# Altium PCB CAS_SMPS_PCB.PcbDoc
Units mm, origin at the board's own origin, x right, y up, seen from the top; angles counter-clockwise.
Board outline 61.38 x 46.04 mm, 2 copper layers (Top Layer, Bottom Layer); 23 components, 9 nets, 64 pads, 169 vias.
Unrouted connection lines stored in the file: 21.
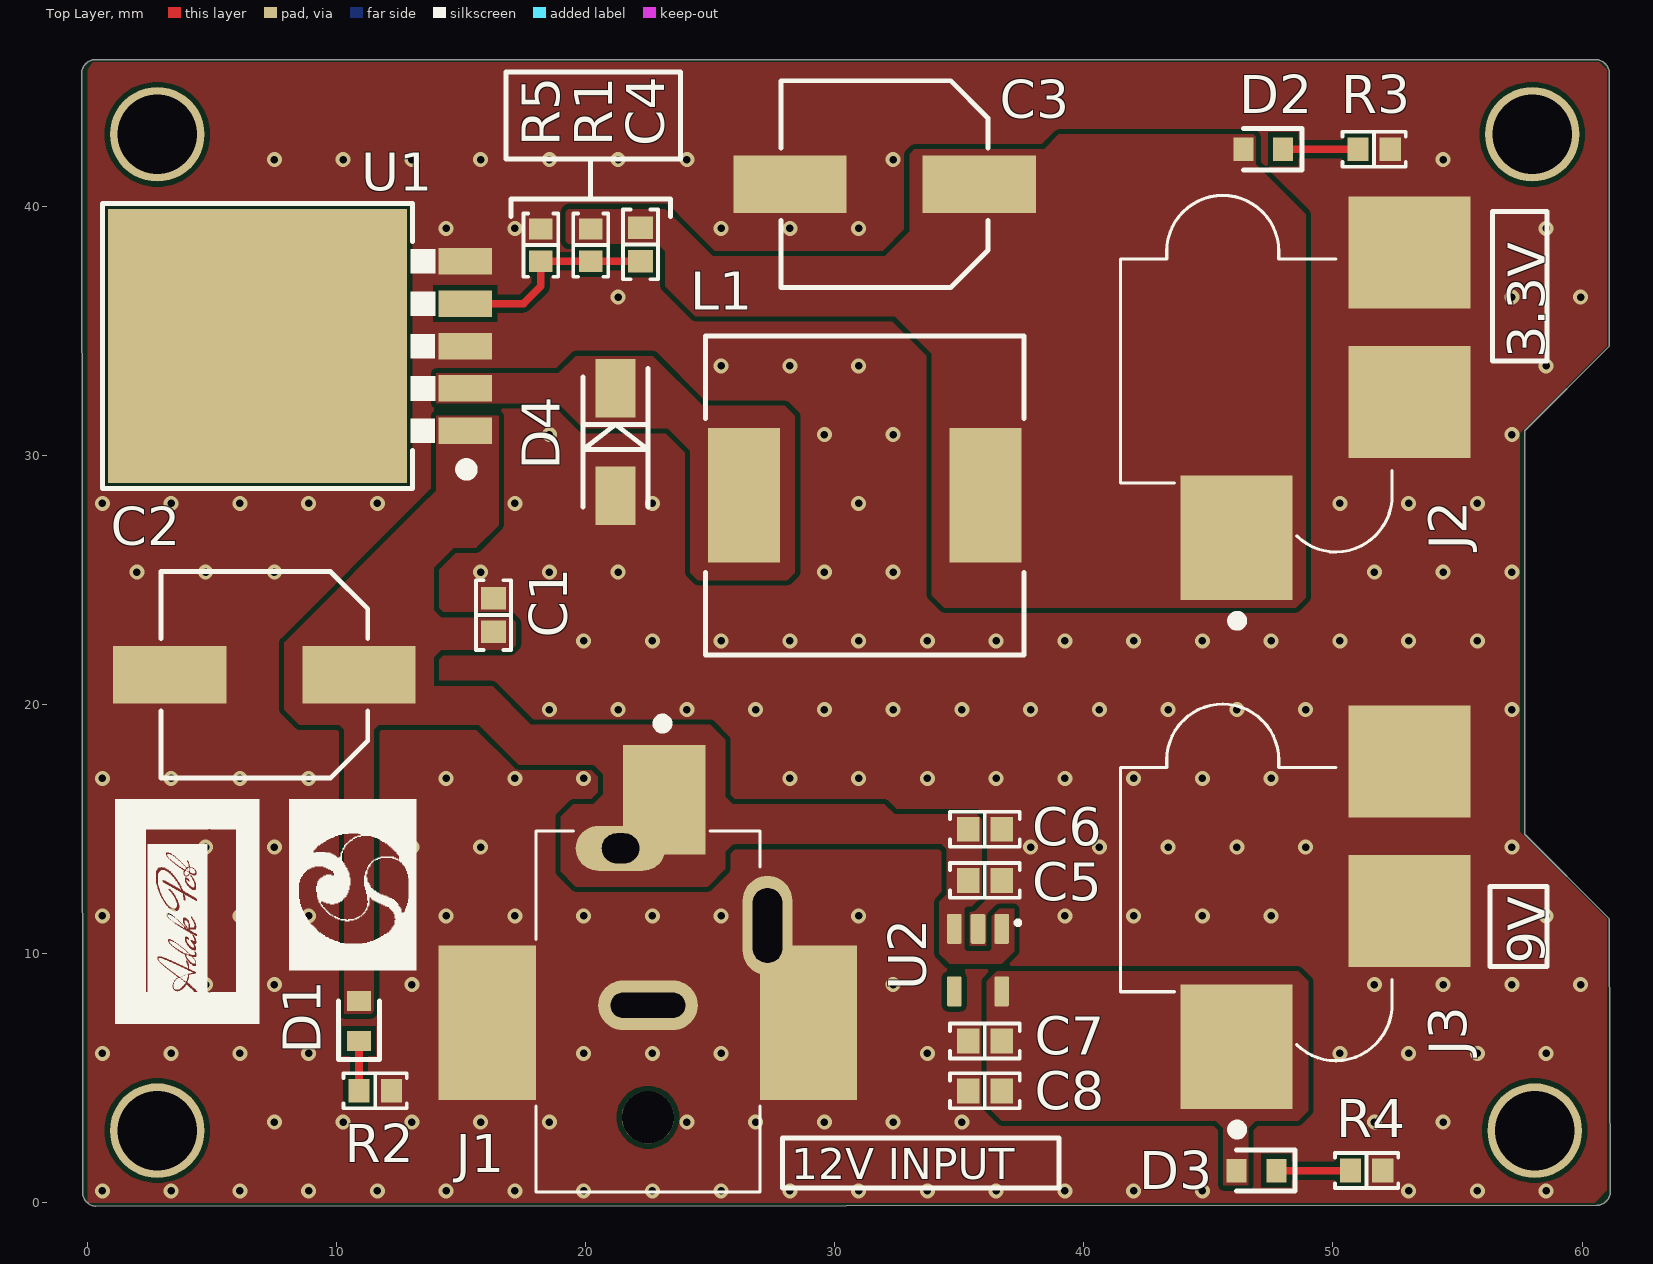
[diagram p0: Top Layer view]
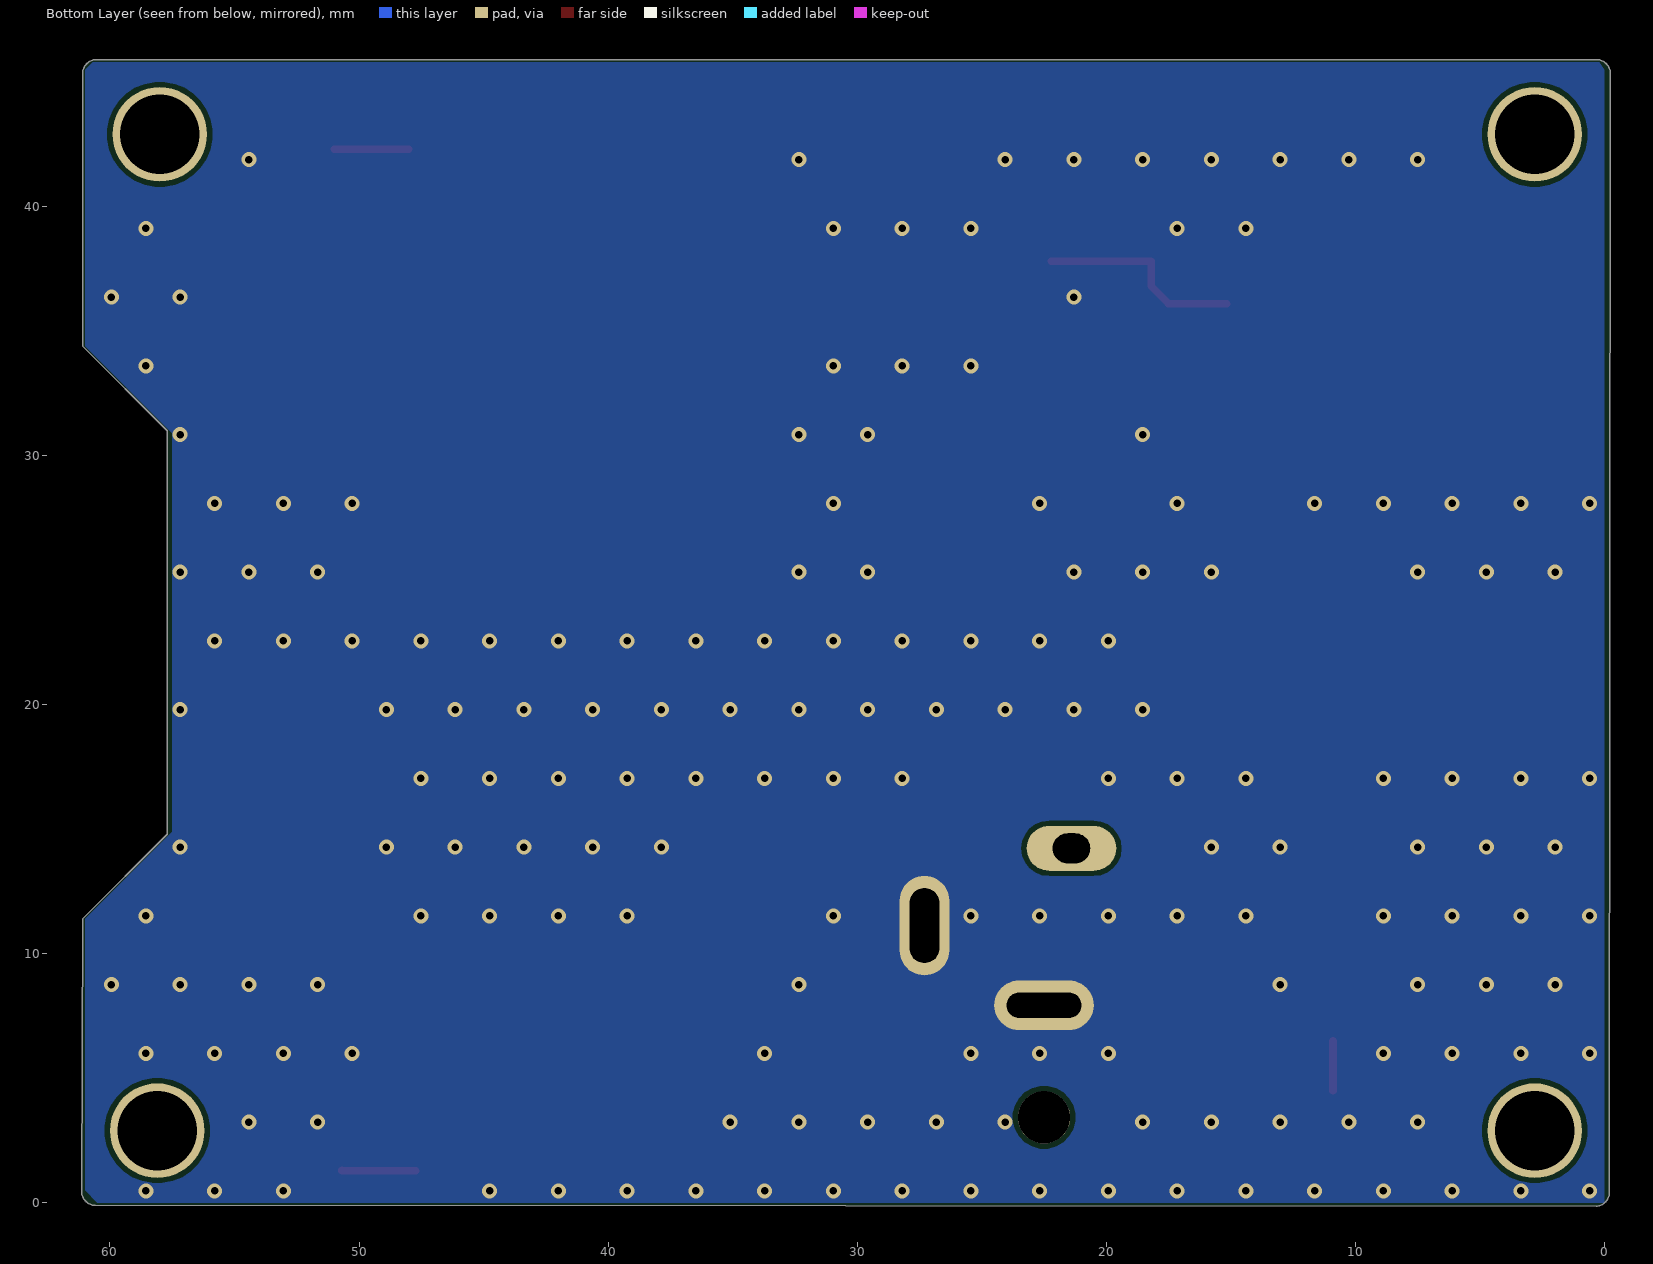
[diagram p1: Bottom Layer view, seen from below]
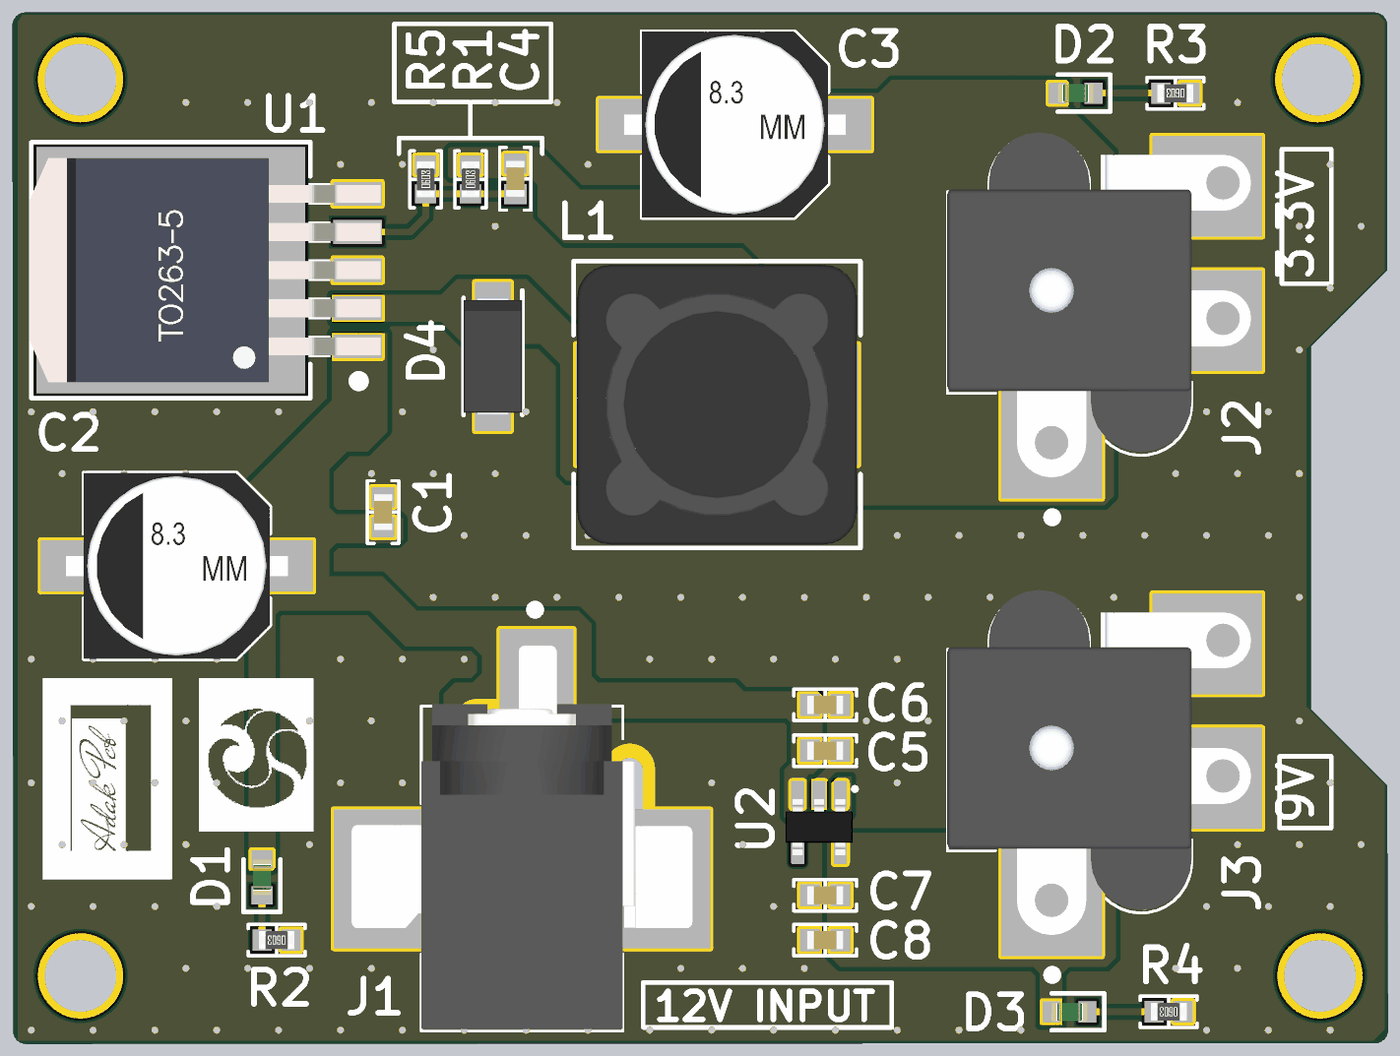
[diagram p2: 3D render of the assembled board from above, using the file's embedded part models]

## Layer stack, top to bottom
Top Solder: solder mask 0.0102, Solder Resist, Dk 3.5
Top Layer: signal copper 0.0356
Dielectric 1: dielectric 0.32, FR-4, Dk 4.8
Bottom Layer: signal copper 0.0356
Bottom Solder: solder mask 0.0102, Solder Resist, Dk 3.5

## Board outline
-0.2,0.4 -0.239,45.361 cw(c0.339,45.323) 0.3,45.9 60.562,45.9 cw(c60.523,45.323) 61.1,45.361 61.1,34.4 57.7,31 57.7,14.8 61.1,11.4 61.139,0.439 cw(c60.561,0.477) 60.6,-0.1 0.339,-0.139 cw(c0.377,0.439)

## Design rules (kind name [scope] priority, off if disabled: settings)
Clearance [All] p1: gap=0.2 ignorepadtopadclearanceinfootprint=FALSE except(0: Arc-Hole Track-Hole SMDPad-Hole THPad-Hole Via-Hole Fill-Hole Poly-Hole Region-Hole Text-Hole)
HoleSize [All] p1: absolutevalues=TRUE maxlimit=3 minlimit=0.05 maxpercent=80.000 minpercent=20.000
PolygonConnect [All] p1: connectstyle=Relief reliefconductorwidth=0.254 reliefentries=4 polygonreliefangle="90 Angle" airgapwidth=0.254
RoutingVias [All] p1: holewidth=0.711 width=1.27 viastyle="Through Hole" minholewidth=0.711 minwidth=1.27 maxholewidth=0.711 maxwidth=1.27
SilkToSilkClearance [All] p1: silktosilkclearance=0.1
SilkToSolderMaskClearance [IsPad] p1: minsilkscreentomaskgap=0.1 clearancetoexposedcopper=TRUE
SolderMaskExpansion [All] p1: expansion=0.132 istentingtop=FALSE
Width [All] p1: maxlimit=0.4 minlimit=0.2 preferedwidth=0.3
27 further rules are at their usual default settings.

## Components (designator, comment, footprint, x,y, rotation, side; value= is the part's Value field where it differs from the comment)
C1 "1µF" "CAP 0603_1608" 16.3,23.6 r270 top
C2 "470μF" "CAP ALSMD 8.3MM H10.5MM" 7.1,21.2 r180 top
C3 "220 µF" "CAP ALSMD 8.3MM H10.5MM" 32,40.9 r180 top
C4 "0.033 µF" "CAP 0603_1608" 22.2,38.479 r270 top
C5 "1µF" "CAP 0603_1608" 36.025,12.95 r180 top
C6 "0.47 µF" "CAP 0603_1608" 36.025,15 r180 top
C7 "0.47 µF" "CAP 0603_1608" 36.025,6.5 r0 top
C8 "1 µF" "CAP 0603_1608" 36.025,4.5 r0 top
D1 "APT1608SGC" LED 10.9,7.3 r90 top
D2 "APT1608SGC" LED 47.2,42.3 r180 top
D3 "APT1608SGC" LED 46.925,1.295 r180 top
D4 "DIODE" DIODE2 21.2,30.548 r270 top
J1 "PJ-037AH-SMT-TR" JACK1 22.5,7.933 r90 top
J2 "CONN PWR JACK" JACK2 49.6,32.425 r90 top
J3 "CONN PWR JACK" JACK2 49.6,12 r90 top
L1 "22 µH" "BOURNS SRR1280" 31.2,28.4 r0 top
R1 "8.2 kOhms" "RES 0603_1608" 20.2,38.454 r90 top
R2 "620 Ohms" "RES 0603_1608" 11.55,4.5 r180 top
R3 "340 Ohms" "RES 0603_1608" 51.65,42.3 r180 top
R4 "56 Ohms" "RES 0603_1608" 51.35,1.3 r180 top
R5 "1.3 kOhms" "RES 0603_1608" 18.2,38.454 r90 top
U1 "AP3003" TO-263-5 8.1,34.4 r90 top
U2 "IC REG LINEAR" SOT-23-5 35.75,9.745 r270 top

## Footprints (in the part's own frame and the unit in brackets; to place one, negate y for a bottom-side part, rotate by r counter-clockwise, add the part's x,y. Pads: shape width x height; smd on the part's side, far side on the other; paste and mask are expansions set on the pad)
"BOURNS SRR1280" [mm] "Precision Wire Wound Inductor, 2-Leads, Body 12.50x12.50mm, IPC Medium Density"
  rect 2.9x5.4 smd: 1(-4.85,0) 2(4.85,0)
  silkscreen extent -6.4,-6.4 6.4,6.4, body extent -6.25,-6.25 6.25,6.25, height 7.9
"CAP 0603_1608" [mm] "Chip Capacitor, 2-Leads, Body 1.60x0.80mm, IPC Medium Density"
  rect 0.9x1 smd: 1(-0.675,0) 2(0.675,0)
  silkscreen extent -1.4,-0.7 1.4,0.7, body extent -0.8,-0.41 0.8,0.41, height 0.82
"CAP ALSMD 8.3MM H10.5MM" [mm] "Aluminum Electrolytic Capacitor, Body 8.30x8.30x10.50mm, IPC Low Density"
  rect 4.55x2.3 smd: 1(-3.8,0) 2(3.8,0)
  silkscreen extent -4.15,-4.15 4.15,4.15, body extent -4.95,-4.15 4.95,4.15, height 10.5
DIODE2 [mm]
  rect 2.35x1.6 smd: 1(-2.15,0) 2(2.15,0)
  silkscreen extent -2.95,-1.31 2.62,1.31, body extent -2.62,-1.31 2.62,1.31, height 2.95
JACK1 [mm]
  rect 4.4x3.3 smd: 1A(8.25,-0.65)
  oval 1.8x3.6 hole 1.2 slot 1.5 at 90 deg: 1B(6.3,1.1)
  rect 6.2x3.9 smd: 2A(-0.7,6.45) 3A(-0.7,-6.45)
  oval 2x4 hole 1 slot 3 at 90 deg: 2B(0,0)
  oval 4x2 hole 1.2 slot 3 at 0 deg: 3B(3.2,-4.8)
  round 2.1 hole 2.1 unplated: ""(-4.5,0)
  silkscreen extent -7.5,-4.5 11.51,4.5, body extent -7.4,-7.6 9.7,7.6, height 11
JACK2 [mm]
  rect 5x4.5 smd: 1(-5.725,3.475)
  rect 4.5x4.9 smd: 2(-0.275,-3.475) 3(5.725,-3.475)
  silkscreen extent -9.25,-2.78 8.03,8.13, body extent -7.27,-5.43 8.13,8.13, height 14.1
LED [mm]
  rect 0.8x0.95 smd: 1(-0.8,0) 2(0.8,0)
  silkscreen extent -1.55,-0.82 0.8,0.82, body extent -0.8,-0.4 0.8,0.4, height 0.76
"RES 0603_1608" [mm] "Chip Resistor, 2-Leads, Body 1.60x0.80mm, IPC Medium Density"
  rect 0.85x0.95 smd: 1(-0.65,0) 2(0.65,0)
  silkscreen extent -1.27,-0.7 1.27,0.7, body extent -0.8,-0.4 0.8,0.4, height 0.45
SOT-23-5 [mm]
  rrect25% 1.21x0.59 smd: 1(-1.255,0.95) 2(-1.255,0) 3(-1.255,-0.95) 4(1.255,-0.95) 5(1.255,0.95)
  silkscreen extent -1.57,1.53 -1.43,1.68, body extent -1.05,-1.5 1.45,1.5, height 1.07
TO-263-5 [mil]
  rect 42x85 smd: 1(-134,-278) 2(-67,-278) 3(0,-278) 4(67,-278) 5(134,-278)
  rect 433.07x472.44 smd: 6(0,50)
  silkscreen extent -225,-288 225,295, body extent -197,-319 197,298, height 188

## Part data
C1 C5: library part 06033D105MAT2A, "CAP CER 1UF 25V X5R 0603", Part Number=06033D105MAT2A
C2: library part 25TPV470M8X10.5, "CAP ALUM 470UF 20% 25V SMD", Part Number=25TPV470M8X10.5
C3: library part 25TXV220M8X10.5, "CAP ALUM 220UF 20% 25V SMD", Device Package="Radial, Can - SMD", ESR (Equivalent Series Resistance)=300mOhm, Lifetime @ Temp.="2000 Hrs @ 125°C", manufacturer=Rubycon, Operating Temperature="-40°C ~ 125°C", Ratings=AEC-Q200, Ripple Current @ High Frequency="220 mA @ 100 kHz", Ripple Current @ Low Frequency="132 mA @ 120 Hz", Supplier Part Number 1=1189-2122-1-ND, Tolerance=±20%, Voltage - Rated="25 V", Applications=Automotive, Capacitance="220 µF", componentlink1description=Datasheet, componentlink1url=http://www.rubycon.co.jp/en/catalog/e_pdfs/aluminum/e_txv.pdf, componentlink2description="DigiKey Link", componentlink2url=https://www.digikey.com/en/products/detail/rubycon/25TXV220M8X10-5/3568741, Height - Seated (Max)="0.413\" (10.50mm)", lastupdated="17.05.2023 20:53:00", Lifecycle Status=Active, Minimum Order=1, Mounting Type="Surface Mount", Package / Case="Radial, Can - SMD", packaging=TapeAndReel, Part Number=25TXV220M8X10.5, Part Status=Active, partid=7686, Polarization=Polar, price=0.20, series=TXV, Size / Dimension="0.315\" Dia (8.00mm)", Supplier 1=DigiKey, Surface Mount Land Size="0.327\" L x 0.327\" W (8.30mm x 8.30mm)"
C4: library part C0603C333J4REC7411, "CAP CER 0603 33NF 16V X7R 5%", Part Number=C0603C333J4REC7411
C6 C7: library part CC0603KRX5R8BB474, "CAP CER 0.47UF 25V X5R 0603", Part Number=CC0603KRX5R8BB474
C8: library part C0603C105K4RACAUTO, "CAP CER 1UF 16V X7R 0603", Part Number=C0603C105K4RACAUTO
D1 D2 D3: "LED GREEN CLEAR 0603 SMD", Case Code (Metric)=1608, Case Code (Imperial)=0603, Color=Green, Forward Current=20mA, Forward Voltage=2.2V, Lens Color=Clear, manufacturer=Kingbright, Max Operating Temperature=85°C, Min Operating Temperature=-40°C, Package Quantity=2000, Supplier Part Number 1=754-1121-1-ND, Case/Package=0603, Category=LEDs, componentlink1description=https://datasheet.ciiva.com/12400/apt1608sgc-32861-12400932.pdf?src-supplier=Mouser, componentlink1url=https://datasheet.ciiva.com/12400/apt1608sgc-32861-12400932.pdf?src-supplier=Mouser, componentlink2description=https://datasheet.ciiva.com/2113/apt1608sgc-2113808.pdf?src-supplier=Digi-Key, componentlink2url=https://datasheet.ciiva.com/2113/apt1608sgc-2113808.pdf?src-supplier=Digi-Key, ComponentLink3Description=https://datasheet.ciiva.com/14603/70062839-14603927.pdf?src-supplier=Allied+Electronics, ComponentLink3URL=https://datasheet.ciiva.com/14603/70062839-14603927.pdf?src-supplier=Allied+Electronics, Dominant Wavelength=568nm, Height=0.75mm, Lead Free="Lead Free", Length=1.6mm, Lens Style=Clear,Flat, Luminous Intensity=15mcd, Manufacturer Part Number=APT1608SGC, Mount="Surface Mount", Number of LEDs=1, Number of Pins=2, packaging="Tape and Reel", Pricing 1="1=0,3, 10=0,235, 100=0,1054, 500=0,09518, 1000=0,07818 (USD)", RoHS=Yes, RoHS Compliant=Yes, series=APT, Stock 1=173873, Supplier 1=Digi-Key, Test Current=20mA, Viewing Angle=120°, Wavelength=568nm, Width=0.8mm, Illumination Color=Green
D4: manufacturer="Sangdest Microelectronics", Manufacturer Part Number=S1G, Supplier Part Number 1=1655-S1GCT-ND, Pricing 1="1=0,13, 10=0,12, 100=0,0655, 500=0,04034, 1000=0,0275, 2000=0,02338 (USD)", RoHS=No, Stock 1=552177, Supplier 1=Digi-Key
J1: "2.0 x 6.3 mm, 5.0 A, Horizontal, Surface Mount (SMT), Dc Power Jack Connector", Case/Package=SMD/SMT, Color=Black, Current Rating=5A, Flammability Rating="UL94 V-0", manufacturer=CUI, Max Operating Temperature=85°C, Min Operating Temperature=-25°C, Package Quantity=200, Supplier Part Number 1=CP-037AHPJCT-ND, Voltage Rating=24V, Insulation Resistance=100MR, Category=Uncategorized, componentlink1description=http://www.mouser.com/ds/2/670/pj-037ah-smt-516065.pdf?src-supplier=Mouser, componentlink1url=http://www.mouser.com/ds/2/670/pj-037ah-smt-516065.pdf?src-supplier=Mouser, componentlink2description=https://www.cui.com/product/resource/digikeypdf/pj-037ah-smt-tr.pdf?src-supplier=Digi-Key, componentlink2url=https://www.cui.com/product/resource/digikeypdf/pj-037ah-smt-tr.pdf?src-supplier=Digi-Key, ComponentLink3Description=http://www.cui.com/product/resource/digikeypdf/pj-037ah-smt.pdf?src-supplier=Digi-Key, ComponentLink3URL=http://www.cui.com/product/resource/digikeypdf/pj-037ah-smt.pdf?src-supplier=Digi-Key, Connector Type=Jack, Contact Gender=Male, Contact Material=Copper, Contact Plating=Nickel, Gender=Male, Housing Color=Black, Housing Material=Thermoplastic, Manufacturer Part Number=PJ-037AH-SMT-TR, Mount="Surface Mount,Through Hole", Number of Conductors=2, Orientation=Horizontal, packaging="Tape and Reel", Pricing 1="1=1,500000, 10=1,304000, 25=1,248800, 50=1,221000 (USD)", RoHS=Yes, Shielding=Unshielded, Stock 1=44, Supplier 1=Digi-Key, Termination=Solder
J2 J3: library part PJ-006A-SMT-TR, "Power Barrel Connector Jack 2.00mm ID (0.079", Case/Package=SMD/SMT, Color=Black, Current Rating=4A, Flammability Rating="UL94 V-0", manufacturer=CUI, Max Operating Temperature=85°C, Min Operating Temperature=-20°C, Package Quantity=250, Voltage Rating=18V, Insulation Resistance=100MR, Category=Uncategorized, componentlink1description=https://datasheet.ciiva.com/16478/pj-006a-smt-16478075.pdf?src-supplier=Future+Electronics, componentlink1url=https://datasheet.ciiva.com/16478/pj-006a-smt-16478075.pdf?src-supplier=Future+Electronics, Connector Type=Jack,Power, Contact Gender=Male, Contact Material=Copper, Contact Plating=Nickel, Gender=Male, Housing Color=Black, Housing Material=Thermoplastic, Lead Free="Lead Free", Manufacturer Part Number=PJ-006A-SMT-TR, Mount="Surface Mount", RoHS=Yes, RoHS Compliant=Yes, series=-, Shielding=Unshielded, Supplier 1="Arrow Electronics", Supplier Part Number 1=PJ-006A-SMT-TR, Termination=Solder
L1: library part SRR1280-220M, "FIXED IND 22UH 4.3A 38.6MOHM SMD", Current - Saturation=4.1A, Current Rating (Amps)="4.3 A", DC Resistance (DCR)="38.6mOhm Max", Device Package=Nonstandard, Frequency - Self Resonant=11MHz, manufacturer="Bourns Inc.", Operating Temperature="-40°C ~ 125°C", Q @ Freq="20 @ 2.52MHz", Supplier Part Number 1=SRR1280-220MCT-ND, Tolerance=±20%, Inductance Frequency - Test="100 kHz", componentlink1description=Datasheet, componentlink1url=https://www.bourns.com/docs/Product-Datasheets/SRR1280.pdf, componentlink2description="DigiKey Link", componentlink2url=https://www.digikey.com/en/products/detail/bourns-inc/SRR1280-220M/1969996, Height - Seated (Max)="0.315\" (8.00mm)", lastupdated="17.05.2023 20:36:29", Lifecycle Status=Active, Material - Core=Ferrite, Minimum Order=1, Mounting Type="Surface Mount", Package / Case=Nonstandard, packaging=TapeAndReel, Part Number=SRR1280-220M, Part Status=Active, partid=18, price=0.53, series=SRR1280, Shielding=Shielded, Size / Dimension="0.492\" L x 0.492\" W (12.50mm x 12.50mm)", Supplier 1=DigiKey, Type="Drum Core, Wirewound", Inductance="22 µH"
R1: library part RT0603BRB078K2L, "RES SMD 8.2K OHM 0.1% 1/10W 0603", Part Number=RT0603BRB078K2L
R2: library part ERA-3AED621V, "RES SMD 620 OHM 0.5% 1/10W 0603", Part Number=ERA-3AED621V
R3: library part RC0603FR-07340RL, "RES 340 OHM 1% 1/10W 0603", Part Number=RC0603FR-07340RL
R4: library part CRGP0603F56R, "RES 56 OHM 1% 1/4W 0603", Part Number=CRGP0603F56R
R5: library part RQ73C1J1K3BTDF, "RQ 0603 1K3 0.1% 10PPM 1K RL", Part Number=RQ73C1J1K3BTDF
U1: "IC REG BUCK ADJ 3A TO263-5"
U2: library part ADP3309ARTZ-3.3-R7, "LDO Regulator Pos 3.3V 0.1A 5-Pin SOT-23 T/R / IC REG LDO 3.3V 0.1A SOT23-5", Case/Package=SOT-23-5, Dropout Voltage=120mV, manufacturer="Analog Devices", Max Operating Temperature=85°C, Max Output Current=100mA, Max Output Voltage=3.6V, Max Supply Current=2mA, Max Input Voltage=12V, Min Operating Temperature=-20°C, Min Output Voltage=2.5V, Min Input Voltage=2.8V, Nominal Output Voltage=3.3V, Output Voltage Accuracy=1.2%, Package Quantity=3000, Power Supply Rejection Ratio (PSRR)=60dB, Quiescent Current=1uA, Supplier Part Number 1=ADP3309ARTZ-3.3-R7CT-ND, Accuracy=1.2%, Category="Voltage Regulators - Linear", componentlink1description=https://datasheet.ciiva.com/2041/adp3309-2041025.pdf?src-supplier=Digi-Key, componentlink1url=https://datasheet.ciiva.com/2041/adp3309-2041025.pdf?src-supplier=Digi-Key, componentlink2description=https://datasheet.ciiva.com/28435/1694316-28435698.pdf?src-supplier=Element14, componentlink2url=https://datasheet.ciiva.com/28435/1694316-28435698.pdf?src-supplier=Element14, ComponentLink3Description=https://datasheet.ciiva.com/2041/adp3309-2041026.pdf?src-supplier=Digi-Key, ComponentLink3URL=https://datasheet.ciiva.com/2041/adp3309-2041026.pdf?src-supplier=Digi-Key, ComponentLink4Description=https://datasheet.ciiva.com/2041/adp3309-2041027.pdf?src-supplier=Digi-Key, ComponentLink4URL=https://datasheet.ciiva.com/2041/adp3309-2041027.pdf?src-supplier=Digi-Key, ComponentLink5Description=https://datasheet.ciiva.com/8241/adp3309-8241749.pdf?src-supplier=Avnet, ComponentLink5URL=https://datasheet.ciiva.com/8241/adp3309-8241749.pdf?src-supplier=Avnet, ComponentLink6Description=https://datasheet.ciiva.com/3224/adp3309-3224702.pdf?src-supplier=Avnet, ComponentLink6URL=https://datasheet.ciiva.com/3224/adp3309-3224702.pdf?src-supplier=Avnet, Height=1.3mm, Lead Free="Contains Lead", Length=2.9mm, Manufacturer Part Number=ADP3309ARTZ-3.3-R7, Nominal Supply Current=2mA, Number of Outputs=1, Number of Pins=5, Number of Regulators=1, Operating Supply Current=2mA, Output Current=100mA, Output Type=Fixed, Output Voltage=3.3V, packaging="Tape and Reel", Polarity=Positive, Pricing 1="1=2,92, 10=2,624, 25=2,4804, 100=2,1497, 250=2,03944, 500=1,82998, 1000=1,56 (USD)", Radiation Hardening=No, Reach SVHC Compliant=No, RoHS=Yes, RoHS Compliant=Yes, series=anyCAP®, Stock 1=2658, Supplier 1=Digi-Key, Width=1.6mm

## Free pads (board coordinates)
  round 3.8 hole 3.2 mask+0.102: 1(58,42.9) 2(58.1,2.9) 3(2.8,2.9) 4(2.8,42.9)

## Via types
v1: diameter 0.6, hole 0.3, Top Layer to Bottom Layer, tented both sides, 169 vias

## Nets (pads, with @x,y where several pads share a name; then routed paths per layer and width w, separated by ;. In a path a pad name is that pad's centre, name@x,y a point inside that pad or via, vN(x,y) a via of type N, cw(c..) or ccw(c..) an arc to the next point about the centre after c; other vN are vias at no path point)
3V3DC: C7.2 C8.2 D3.2 J3.1 U2.5
9VDC: C3.1 C4.1 D2.2 J2.1 L1.2 R1.2
12VDC: C1.2 C2.1 C5.2 C6.2 D1.2 J1.1A J1.1B U1.1 U2.1 U2.3
FB: C4.2 R1.1 R5.1 U1.4 | length 8.3
  Top Layer w0.305: U1.4 17.502,36.102 18.2,36.8 R5.1 R1.1 C4.2
GND: C1.1 C2.2 C3.2 C5.1 C6.1 C7.1 C8.1 D4.2 J1.2A J1.2B J1.3A J1.3B J2.2 J2.3 J3.2 J3.3 R2.1 R3.1 R4.1 R5.2 U1.3 U1.5 U2.2
  other v1: 0.6,0.48 3.36,0.48 6.12,0.48 8.88,0.48 11.64,0.48 14.4,0.48 17.16,0.48 19.92,0.48 22.68,0.48 25.44,0.48 28.2,0.48 30.96,0.48 33.72,0.48 36.48,0.48 39.24,0.48 42,0.48 44.76,0.48 53.04,0.48 55.8,0.48 58.56,0.48 7.5,3.24 10.26,3.24 13.02,3.24 15.78,3.24 18.54,3.24 24.06,3.24 26.82,3.24 29.58,3.24 32.34,3.24 35.1,3.24 51.66,3.24 54.42,3.24 0.6,6 3.36,6 6.12,6 8.88,6 19.92,6 22.68,6 25.44,6 33.72,6 50.28,6 53.04,6 55.8,6 58.56,6 1.98,8.76 4.74,8.76 7.5,8.76 13.02,8.76 32.34,8.76 51.66,8.76 54.42,8.76 57.18,8.76 59.94,8.76 0.6,11.52 3.36,11.52 6.12,11.52 8.88,11.52 14.4,11.52 17.16,11.52 19.92,11.52 22.68,11.52 25.44,11.52 30.96,11.52 39.24,11.52 42,11.52 44.76,11.52 47.52,11.52 58.56,11.52 1.98,14.28 4.74,14.28 7.5,14.28 13.02,14.28 15.78,14.28 37.86,14.28 40.62,14.28 43.38,14.28 46.14,14.28 48.9,14.28 57.18,14.28 0.6,17.04 3.36,17.04 6.12,17.04 8.88,17.04 14.4,17.04 17.16,17.04 19.92,17.04 28.2,17.04 30.96,17.04 33.72,17.04 36.48,17.04 39.24,17.04 42,17.04 44.76,17.04 47.52,17.04 18.54,19.8 21.3,19.8 24.06,19.8 26.82,19.8 29.58,19.8 32.34,19.8 35.1,19.8 37.86,19.8 40.62,19.8 43.38,19.8 46.14,19.8 48.9,19.8 57.18,19.8 19.92,22.56 22.68,22.56 25.44,22.56 28.2,22.56 30.96,22.56 33.72,22.56 36.48,22.56 39.24,22.56 42,22.56 44.76,22.56 47.52,22.56 50.28,22.56 53.04,22.56 55.8,22.56 1.98,25.32 4.74,25.32 7.5,25.32 15.78,25.32 18.54,25.32 21.3,25.32 29.58,25.32 32.34,25.32 51.66,25.32 54.42,25.32 57.18,25.32 0.6,28.08 3.36,28.08 6.12,28.08 8.88,28.08 11.64,28.08 17.16,28.08 22.68,28.08 30.96,28.08 50.28,28.08 53.04,28.08 55.8,28.08 18.54,30.84 29.58,30.84 32.34,30.84 57.18,30.84 25.44,33.6 28.2,33.6 30.96,33.6 58.56,33.6 21.3,36.36 57.18,36.36 59.94,36.36 14.4,39.12 17.16,39.12 25.44,39.12 28.2,39.12 30.96,39.12 58.56,39.12 7.5,41.88 10.26,41.88 13.02,41.88 15.78,41.88 18.54,41.88 21.3,41.88 24.06,41.88 32.34,41.88 54.42,41.88
NetD1_1: D1.1 R2.2 | length 2
  Top Layer w0.305: R2.2 D1.1
NetD2_1: D2.1 R3.2 | length 3
  Top Layer w0.305: D2.1 R3.2
NetD3_1: D3.1 R4.2 | length 3
  Top Layer w0.305: D3.1 50.695,1.295 R4.2
NetD4_1: D4.1 L1.1 U1.2
pads on no net: J1. U1.6 U2.4

## Polygon pours and split planes (outlines as drawn)
GND on Top Layer "NONET_L-01_P-001" (solid, pour order 28): 0,45.5 0,0 60.5,0 61,0.5 61,11.4 57.5,14.9 57.5,30.9 61,34.4 61,45.5 60.7,45.8 0.2,45.8
9VDC on Top Layer "NONET_L-01_P-001" (solid, pour order 26): 48.5,23.9 48.9,24.3 48.9,39.7 46.9,41.7 46.9,42.8 46.8,42.9 46,42.9 39,42.9 38.4,42.3 33.2,42.3 33,42.1 33,39 32,38 25.1,38 24,39.1 23.2,39.9 19.3,39.9 19.2,39.8 19.2,38.6 19.3,38.5 22.9,38.5 23.2,38.2 23.2,36.8 24.4,35.6 32.4,35.6 33.9,34.1 33.9,24.4 34.4,23.9
3V3DC on Top Layer "Top Layer-3V3DC" (solid, pour order 24): 46.9,3.3 48.6,3.3 49,3.7 49,8.9 48.6,9.3 38.3,9.3 36.5,9.3 36.1,8.9 36.1,3.9 36.7,3.3 45.3,3.3 45.6,3 45.6,0.7 46.6,0.7 46.6,3
NetD4_1 on Top Layer "NONET_L-01_P-001" (solid, pour order 21): 14,33.3 14,32.1 18.9,32.1 19.9,31.1 23.3,31.1 24.2,30.2 24.2,25.3 24.5,25 28.1,25 28.4,25.3 28.4,31.6 28,32 24.7,32 22.7,34 19.6,34 18.9,33.3
12VDC on Top Layer "Top Layer-12VDC" (solid, pour order 20): 34.6,9.6 36.7,9.6 37.2,10.1 37.2,11.8 36.6,11.8 36.3,11.5 36.3,10.2 36.2,10.1 35.3,10.1 35.2,10.2 35.2,11.8 35.3,11.9 35.5,11.9 35.9,12.3 35.9,15.4 35.7,15.6 32.4,15.6 32,16 25.9,16 25.6,16.3 25.6,18.6 25,19.2 17.8,19.2 16.25,20.75 13.9,20.75 13.9,21.9 14.2,22.2 17,22.2 17.2,22.4 17.2,23.3 17,23.5 14.2,23.5 13.9,23.8 13.9,25.5 14.7,26.3 15.6,26.3 16.5,27.2 16.5,31.6 14,31.6 14,30.4 14,28.6 13.4,28 7.9,22.5 7.9,19.8 8.5,19.2 10.1,19.2 10.3,19 10.3,7.6 11.5,7.6 11.5,19 11.7,19.2 15.7,19.2 17.3,17.6 20.3,17.6 20.7,17.2 20.7,16.4 20.3,16 19.5,16 19,15.5 19,13.3 19.6,12.7 24.9,12.7 25.6,13.4 25.6,14.1 25.9,14.4 34.3,14.4 34.5,14.2 34.5,12.4 34.2,12.1 34.2,10
GND on Bottom Layer "NONET_L-01_P-001" (solid, pour order 29): 0,45.5 0,0 60.5,0 61,0.5 61,11.4 57.5,14.9 57.5,30.9 61,34.4 61,45.5 60.7,45.8 0.2,45.8

## Silkscreen, mask and mechanical layers (free items; w line width, h text height)
Top Overlay:
  drawing of 45 lines, arcs and shapes, not listed
  text "3.3V" at 58.5,33.9 h1.5 r90
  text "9V" at 58.5,9.6 h1.5 r90
  text "12V INPUT" at 28.25,0.95 h1.25